# Altium PCB PT-MIS-PCB-003_v1 PCB.PcbDoc
Units mm, origin at the board's own origin, x right, y up, seen from the top; angles counter-clockwise.
Board outline 97 x 100 mm, 2 copper layers (Top Layer, Bottom Layer), stack 1.58 mm thick; 10 components, 5 nets, 37 pads, 42 vias.
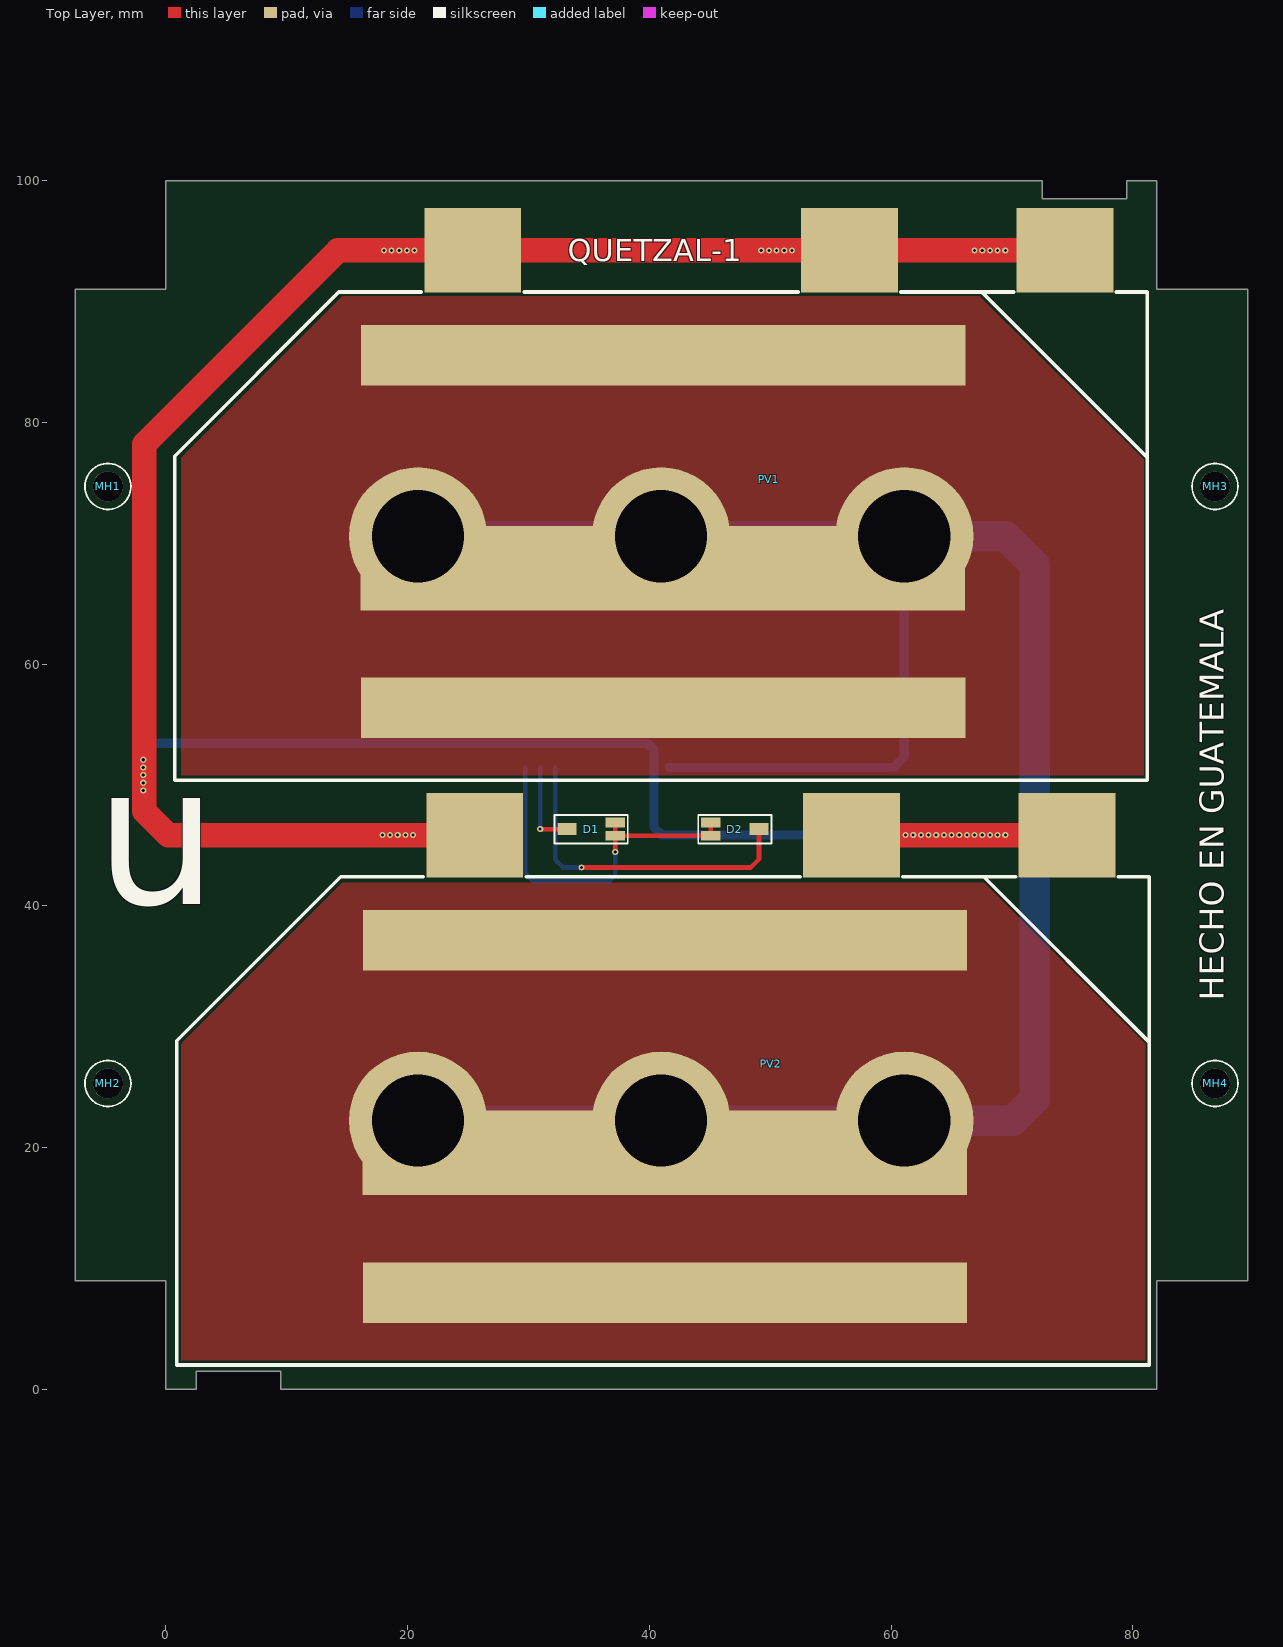
[diagram p0: Top Layer view]
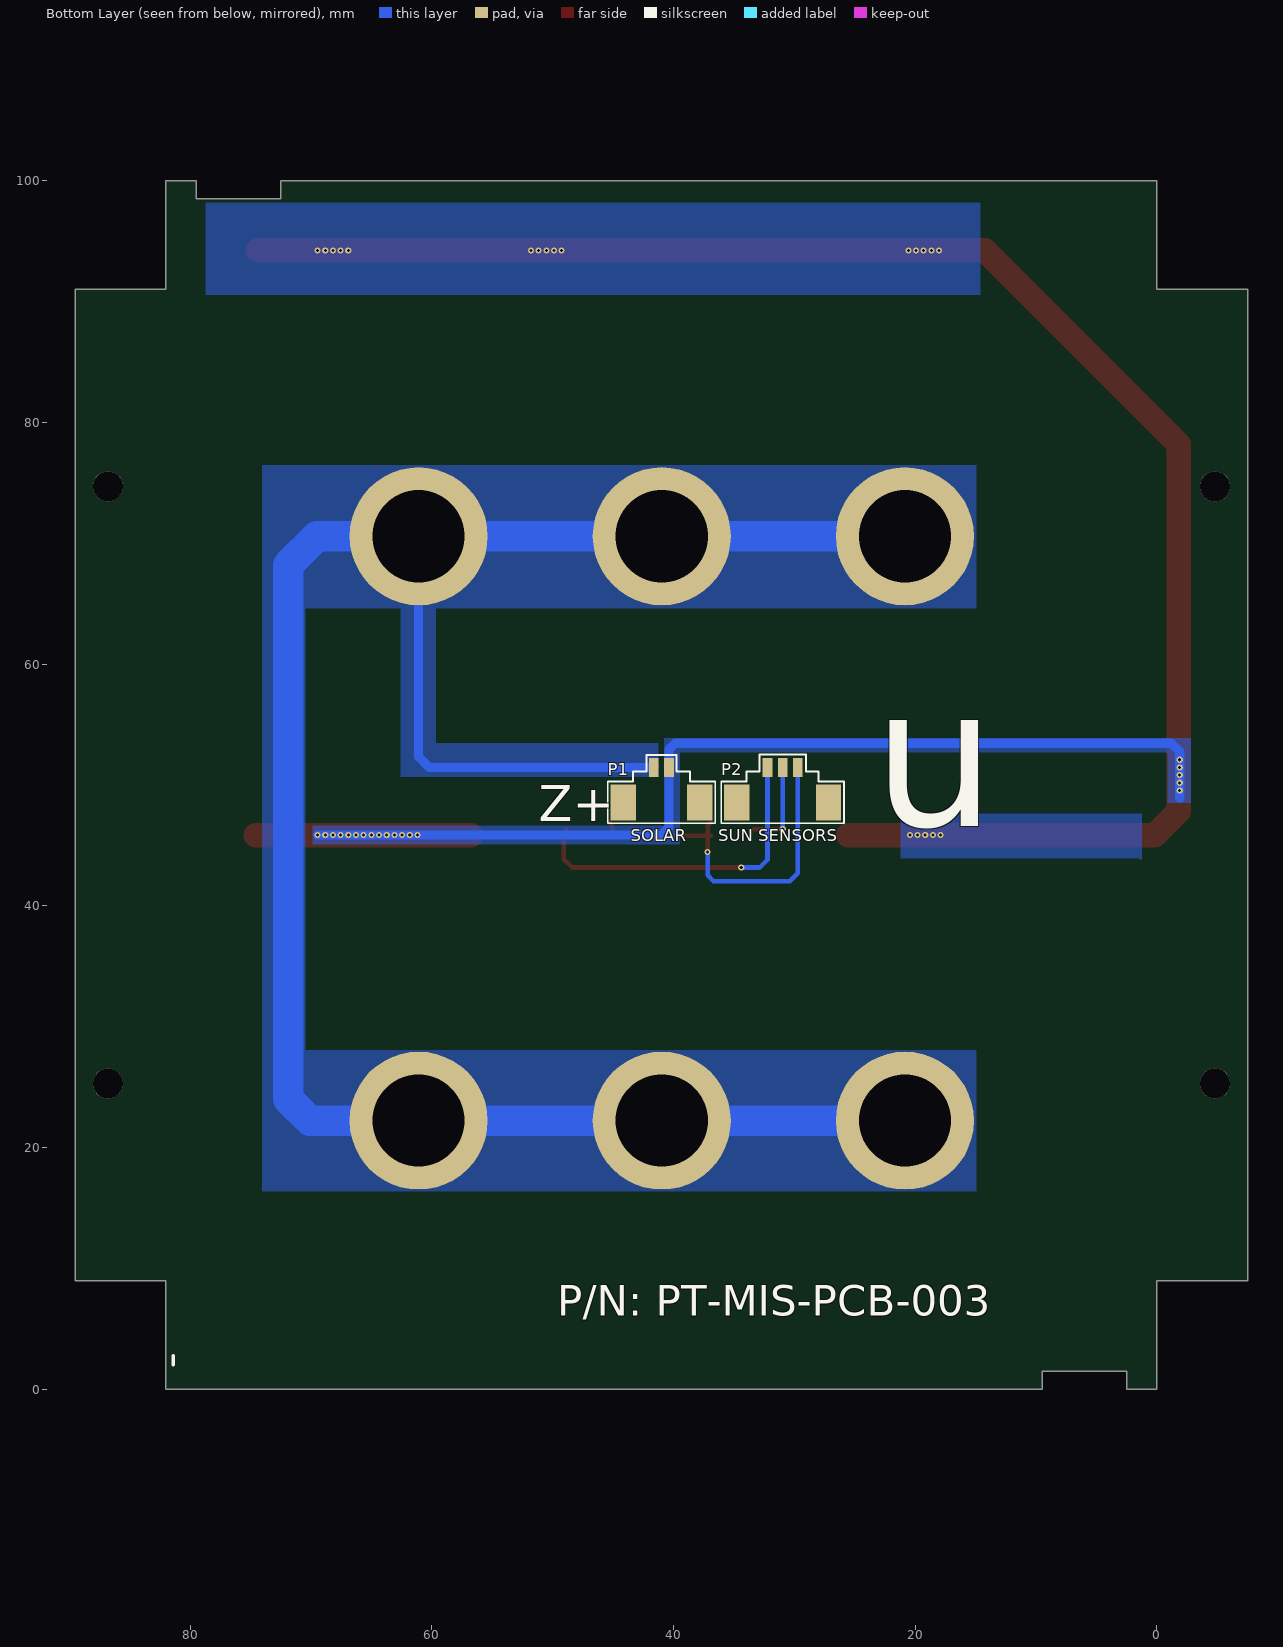
[diagram p1: Bottom Layer view, seen from below]
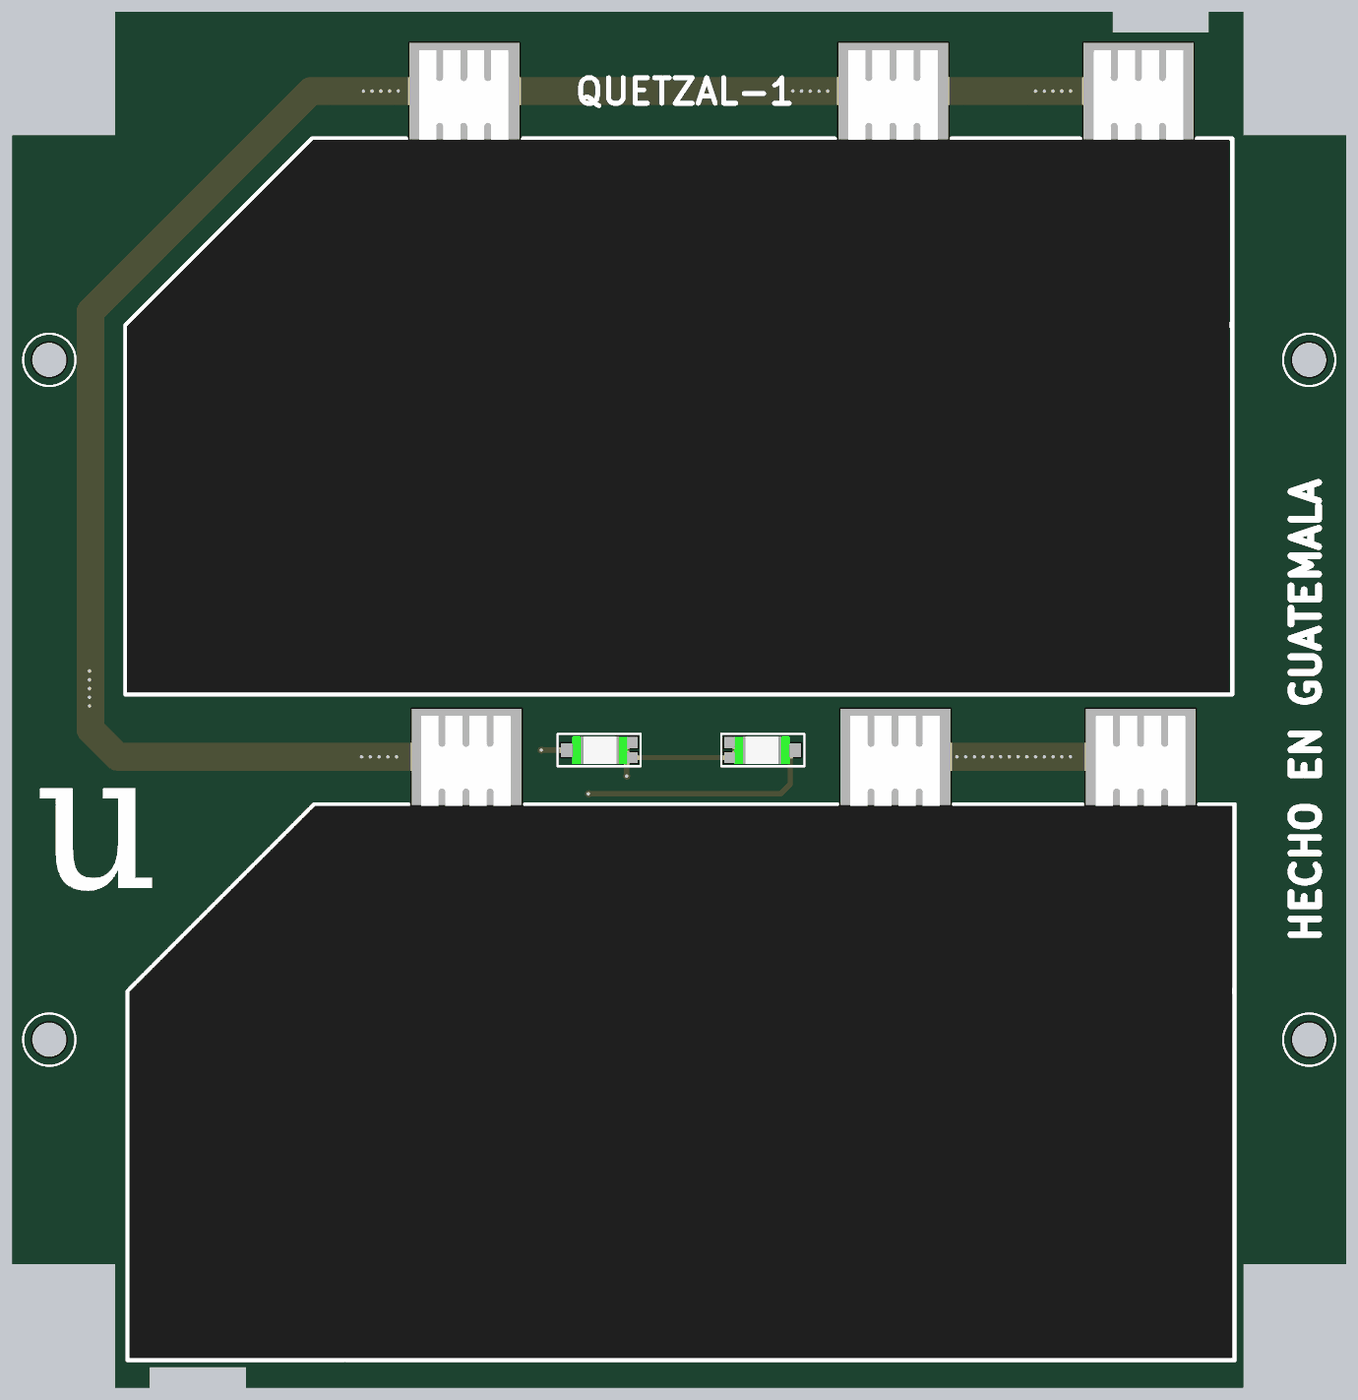
[diagram p2: 3D render of the assembled board from above, using the file's embedded part models]

## Layer stack, top to bottom
Top Solder: solder mask 0.0102, Solder Resist, Dk 3.5
Top Layer: signal copper 0.0356
Dielectric 1: dielectric 1.5086, FR-4, Dk 4.8
Bottom Layer: signal copper 0.0356
Bottom Solder: solder mask 0.0102, Solder Resist, Dk 3.5

## Board outline
0,9 0,0 2.5,0 2.5,1.5 9.5,1.5 9.5,0 82,0 82,9 89.5,9 89.5,91 82,91 82,100 79.5,100 79.5,98.5 72.5,98.5 72.5,100 0,100 0,91 -7.5,91 -7.5,9

## Design rules (kind name [scope] priority, off if disabled: settings)
Clearance [All] p1: gap=0.254 ignorepadtopadclearanceinfootprint=FALSE except(0: Arc-Hole Track-Hole SMDPad-Hole THPad-Hole Via-Hole Fill-Hole Poly-Hole Region-Hole Text-Hole)
PolygonConnect [All] p1: connectstyle=Direct reliefconductorwidth=0.254 reliefentries=4 polygonreliefangle="90 Angle" airgapwidth=0.254
RoutingVias [All] p1: holewidth=0.711 width=1.27 viastyle="Through Hole" minholewidth=0.711 minwidth=1.27 maxholewidth=0.711 maxwidth=1.27
SolderMaskExpansion [All] p1: expansion=0.102
Width [All] p1: maxlimit=2.54 minlimit=0.254 preferedwidth=0.254
30 further rules are at their usual default settings.

## Classes and differential pairs
component class "[03] - SCHEMATIC": D1 D2 MH1 MH2 MH3 MH4 P1 P2

## Components (designator, comment, footprint, x,y, rotation, side; value= is the part's Value field where it differs from the comment)
D1 "TEMD6010FX01" TEMD6010FX01 35.155,46.342 r180 top
D2 "TEMD6010FX01" TEMD6010FX01 47.096,46.342 r0 top
MH1 "MH_3.8MMNC_2MMD" MH_3.8MMNC_2MMD_NON_COPPER_NPTH -4.8,74.7 r0 top
MH2 "MH_3.8MMNC_2MMD" MH_3.8MMNC_2MMD_NON_COPPER_NPTH -4.8,25.3 r0 top
MH3 "MH_3.8MMNC_2MMD" MH_3.8MMNC_2MMD_NON_COPPER_NPTH 86.8,74.7 r0 top
MH4 "MH_3.8MMNC_2MMD" MH_3.8MMNC_2MMD_NON_COPPER_NPTH 86.8,25.3 r0 top
P1 "0533980271" 0533980271 41,50 r180 bottom
P2 "0533980371" 0533980371 30.977,50 r180 bottom
PV1 "AZUR SPACE 3G30A" "AZUR SPACE 3G30A" 41.11,67.937 r0 top
PV2 "AZUR SPACE 3G30A" "AZUR SPACE 3G30A" 41.275,19.558 r0 top

## Footprints (in the part's own frame and the unit in brackets; to place one, negate y for a bottom-side part, rotate by r counter-clockwise, add the part's x,y. Pads: shape width x height; smd on the part's side, far side on the other; paste and mask are expansions set on the pad)
0533980271 [mm] "CONN HEADER 2POS 1.25MM VERT SMD"
  rect 2.1x3 smd: 0(-3.175,-1.45) 0(3.175,-1.45)
  rect 0.8x1.6 smd: 1(-0.625,1.45) 2(0.625,1.45)
  silkscreen extent -4.45,-3.17 4.45,2.48, body extent -3.82,-2.72 3.83,1.48, height 4.71
0533980371 [mm] "CONN HEADER 3POS 1.25MM VERT SMD"
  rect 2.1x3 smd: 0(-3.8,-1.45) 0(3.8,-1.45)
  rect 0.8x1.6 smd: 1(-1.25,1.45) 2(0,1.45) 3(1.25,1.45)
  silkscreen extent -5.07,-3.18 5.07,2.53, body extent -4.45,-2.67 4.45,1.53, height 4.68
"AZUR SPACE 3G30A" [mm] "30% Triple Junction GaAs Solar Cell Assembly"
  rect 50x7 smd: 1(0,0)
  rect 50x5 smd: 1(0.026,-11.557) 1(0.026,17.602)
  rect 8x7 smd: 2(-15.727,26.297) 2(15.448,26.297) 3(33.273,26.297)
  silkscreen extent -40.38,-17.55 40.1,22.85, body extent -40.25,-17.41 39.9,29.27, height 0.31
MH_3.8MMNC_2MMD_NON_COPPER_NPTH [mm] "Mounting Hole 3.8mm Diameter (Non Copper), 2mm Drill NPTH"
  round 2.5 hole 2.5 unplated: 1(0,0)
  silkscreen extent -1.9,-1.9 1.9,1.9
TEMD6010FX01 [mm]
  rect 1.6x0.8 smd: 1(-2.025,-0.55) 1(-2.025,0.55)
  rect 1.6x1 smd: 2(1.975,0)
  silkscreen extent -3.05,-1.17 3,1.18, body extent -2.07,-1 1.93,1, height 1.01

## Part data
D1 D2: "Ambient Light Sensor", Current - Dark (Typ)=2nA, Manufacturer="Vishay Semiconductors", Operating Temperature="-40°C ~ 100°C", Standard Package=3,000, Supplier Part Number 1=751-1051-1-ND, Voltage - DC Reverse (Vr) (Max)=16V, Active Area=0.27mm², Catalog Drawings=TEMx60x0(F)X01, Category="Sensors, Transducers", ComponentLink1Description=https://datasheet.ciiva.com/8280/temd6010-8280593.pdf, ComponentLink1URL=https://datasheet.ciiva.com/8280/temd6010-8280593.pdf, ComponentLink2Description=https://datasheet.ciiva.com/1252/temd6010-1252130.pdf, ComponentLink2URL=https://datasheet.ciiva.com/1252/temd6010-1252130.pdf, ComponentLink3Description=https://datasheet.ciiva.com/2819/temd6010-2819730.pdf, ComponentLink3URL=https://datasheet.ciiva.com/2819/temd6010-2819730.pdf, ComponentLink4Description=https://datasheet.ciiva.com/2819/temd6010-2819731.pdf, ComponentLink4URL=https://datasheet.ciiva.com/2819/temd6010-2819731.pdf, ComponentLink5Description=https://datasheet.ciiva.com/2819/temd6010-2819732.pdf, ComponentLink5URL=https://datasheet.ciiva.com/2819/temd6010-2819732.pdf, ComponentLink6Description=https://datasheet.ciiva.com/4270/temd6010-4270070.pdf, ComponentLink6URL=https://datasheet.ciiva.com/4270/temd6010-4270070.pdf, ComponentLink7Description=https://datasheet.ciiva.com/46430/1794172-46430214.pdf, ComponentLink7URL=https://datasheet.ciiva.com/46430/1794172-46430214.pdf, ComponentLink8Description=https://datasheet.ciiva.com/1249/temd6010-1249179.pdf, ComponentLink8URL=https://datasheet.ciiva.com/1249/temd6010-1249179.pdf, ComponentLink9Description=https://datasheet.ciiva.com/4697/temd6010-102586-4697659.pdf, ComponentLink9URL=https://datasheet.ciiva.com/4697/temd6010-102586-4697659.pdf, Diode Type=PIN, Family="Optical Sensors - Photodiodes", Featured Product="Surface-Mount Ambient Light Sensing Photodiodes", Manufacturer Part Number=TEMD6010FX01, Mounting Type="Surface Mount", Online Catalog="Ambient Light Sensor", Other Names=751-1051-2, Packaging="Tape & Reel (TR)", Pricing 1="1=2.26, 10=1.998, 25=1.4824, 100=1.2892, 250=1.1603, 500=1.0314, 1000=0.8863 (USD)", Product Training Modules="Ambient Light Sensors", Spectral Range="430nm ~ 610nm", Stock 1=29, Supplier 1=Digi-Key, Viewing Angle=120°, Wavelength=540nm
MH1 MH2 MH3 MH4: "Mounting Hole 3.8mm Diameter (Non Copper), 2mm Drill NPTH"
P1: "2 Positions Header, Shrouded Connector 0.049\" (1.25mm) Surface Mount, Right Angle Tin", Color=Natural, Manufacturer=Molex, Supplier Part Number 1=WM7606CT-ND, Category="Connectors, Interconnects", ComponentLink1Description=https://datasheet.ciiva.com/6813/533980271-sd-6813860.pdf, ComponentLink1URL=https://datasheet.ciiva.com/6813/533980271-sd-6813860.pdf, ComponentLink2Description=https://datasheet.ciiva.com/3117/0533980271-pcb-headers-3117624.pdf, ComponentLink2URL=https://datasheet.ciiva.com/3117/0533980271-pcb-headers-3117624.pdf, ComponentLink3Description=https://datasheet.ciiva.com/3117/0533980271-pcb-headers-3117625.pdf, ComponentLink3URL=https://datasheet.ciiva.com/3117/0533980271-pcb-headers-3117625.pdf, ComponentLink4Description=https://datasheet.ciiva.com/6813/533980271-sd-6813869.pdf, ComponentLink4URL=https://datasheet.ciiva.com/6813/533980271-sd-6813869.pdf, Connector Type="Header, Shrouded", Contact Finish=Tin, Contact Finish Thickness="39µin (1.00µm)", Contact Mating Length=-, Contact Type="Blade Pin", Family="Rectangular Connectors - Headers, Male Pins", Fastening Type=-, Features="Solder Retention", Manufacturer Part Number=0533980271, Mounting Type="Surface Mount", Number of Positions=2, Number of Positions Loaded=All, Number of Rows=1, Packaging="Cut Tape (CT)", Pitch="0.049\" (1.25mm)", Pricing 1="1=0.88, 10=0.778, 100=0.6713, 500=0.5493 (USD)", Row Spacing=-, Series="PicoBlade™ 53398", Stock 1=25214, Supplier 1=Digi-Key, Termination=Solder
P2: "3 Positions Header, Shrouded Connector 0.049\" (1.25mm) Surface Mount Tin", Color=Natural, Manufacturer=Molex, Supplier Part Number 1=WM7607CT-ND, Category="Connectors, Interconnects", ComponentLink1Description=https://datasheet.ciiva.com/6813/533980271-sd-6813860.pdf, ComponentLink1URL=https://datasheet.ciiva.com/6813/533980271-sd-6813860.pdf, ComponentLink2Description=https://datasheet.ciiva.com/3117/0533980371-pcb-headers-3117626.pdf, ComponentLink2URL=https://datasheet.ciiva.com/3117/0533980371-pcb-headers-3117626.pdf, ComponentLink3Description=https://datasheet.ciiva.com/3117/0533980371-pcb-headers-3117627.pdf, ComponentLink3URL=https://datasheet.ciiva.com/3117/0533980371-pcb-headers-3117627.pdf, Connector Type="Header, Shrouded", Contact Finish=Tin, Contact Finish Thickness="39µin (1.00µm)", Contact Mating Length=-, Contact Type="Blade Pin", Family="Rectangular Connectors - Headers, Male Pins", Fastening Type=-, Features="Solder Retention", Manufacturer Part Number=0533980371, Mounting Type="Surface Mount", Number of Positions=3, Number of Positions Loaded=All, Number of Rows=1, Packaging=Digi-Reel®, Pitch="0.049\" (1.25mm)", Pricing 1="1=1.07, 10=0.942, 100=0.8126, 500=0.6649 (USD)", Row Spacing=-, Series="PicoBlade™ 53398", Stock 1=26974, Supplier 1=Digi-Key, Termination=Solder
PV1 PV2: "30% Triple Junction GaAs Solar Cell Assembly", Current at max. Power="502.9 mA", Voltage at max.Power="2409 mV", Average Efficiency (1353 W/m^2)=29.6, Average Efficiency (1367 W/m^2)=29.3, Average Open Circuit (BOL)="2690 mV", Average Short Circuit (BOL)="519.6 mA"

## Free pads (board coordinates)
  round 11.43 hole 7.62: 2(20.858,22.225) 2(20.858,70.574) 2(40.975,22.225) 2(40.975,70.574) 2(61.091,22.225) 2(61.091,70.574)

## Via types
v1: diameter 0.508, hole 0.254, Top Layer to Bottom Layer, tented both sides, 42 vias

## Nets (pads, with @x,y where several pads share a name; then routed paths per layer and width w, separated by ;. In a path a pad name is that pad's centre, name@x,y a point inside that pad or via, vN(x,y) a via of type N, cw(c..) or ccw(c..) an arc to the next point about the centre after c; other vN are vias at no path point)
2.35V: P1.1 pad.2 PV1.1 PV2.1 | length 186
  Bottom Layer w0.762: P1.1 60.205,51.45 61.091,52.337 pad.2@61.091,70.574
  Bottom Layer w2.54: pad.2@20.858,22.225 40.975,22.225 61.091,22.225 70.096,22.225 71.886,24.016 71.886,68.186 69.499,70.574 61.091,70.574 40.975,70.574 pad.2@20.858,70.574
GND: P1.2 PV1.2 PV1.3 PV2.2 PV2.3 | length 241.5
  Top Layer w2.032: PV2.2@25.548,45.855 v1(20.447,45.855) v1(19.177,45.855) v1(18.542,45.855) v1(17.907,45.855) 0.187,45.855 -1.799,47.841 -1.799,50.815 -1.799,52.085 -1.799,78.194 14.24,94.234 v1(18.034,94.234) v1(18.669,94.234) v1(19.939,94.234) v1(20.574,94.234) 25.383,94.234 v1(49.255,94.234) v1(49.89,94.234) v1(50.525,94.234) v1(51.16,94.234) v1(51.795,94.234) v1(66.908,94.234) v1(67.543,94.234) v1(68.178,94.234) v1(68.813,94.234) v1(69.448,94.234) PV1.3@74.383,94.234 ; PV2.2@56.723,45.855 v1(61.193,45.855) v1(61.828,45.855) v1(62.463,45.855) v1(63.098,45.855) v1(63.733,45.855) v1(64.368,45.855) v1(65.003,45.855) v1(65.638,45.855) v1(66.273,45.855) v1(66.908,45.855) v1(67.543,45.855) v1(68.178,45.855) v1(68.813,45.855) v1(69.448,45.855) PV2.3
  Bottom Layer w0.762: -1.877,48.91 v1(-1.877,49.545) v1(-1.877,50.18) v1(-1.877,50.815) v1(-1.877,51.45) v1(-1.877,52.085) -1.877,52.741 -1.164,53.454 39.857,53.454 40.375,52.936 P1.2 40.375,46.51 41.03,45.855 v1(61.193,45.855) v1(61.828,45.855) v1(62.463,45.855) v1(63.098,45.855) v1(63.733,45.855) v1(64.368,45.855) v1(65.003,45.855) v1(65.638,45.855) v1(66.273,45.855) v1(66.908,45.855) v1(67.543,45.855) v1(68.178,45.855) v1(68.813,45.855) v1(69.448,45.855)
  other v1: 19.812,45.847 19.304,94.234
NetD1_1: D1.1 D2.1 P2.3 | length 31.1
  Top Layer w0.254: D1.1@37.18,45.554 36.942,45.792 D1.1@37.18,46.03 ; D2.1@45.071,46.042 D2.1@45.321,45.792
  Top Layer w0.381: D1.1@36.93,45.792 36.942,45.792 D2.1@45.321,45.792 ; D1.1@36.93,46.892 37.18,46.642 D1.1@37.18,46.03 ; v1(37.18,44.45) D1.1@37.18,45.554 ; D2.1@45.071,46.042 45.071,46.642 D2.1@45.321,46.892
  Bottom Layer w0.381: P2.3 29.727,42.689 30.392,42.024 36.69,42.024 37.18,42.514 v1(37.18,44.45)
NetD1_2: D1.2 P2.2 | length 7.5
  Top Layer w0.381: v1(30.967,46.342) D1.2 D1.2@33.38,46.342
  Bottom Layer w0.254: v1(30.967,46.342) v1@30.977,46.352
  Bottom Layer w0.381: v1@30.977,46.352 P2.2
NetD2_2: D2.2 P2.1 | length 27.6
  Top Layer w0.381: v1(34.396,43.167) 48.374,43.167 49.071,43.864 49.071,46.142 D2.2@48.871,46.342
  Bottom Layer w0.381: P2.1 32.227,43.812 32.872,43.167 v1(34.396,43.167)
pads on no net: MH1.1 MH2.1 MH3.1 MH4.1 P1.0 P2.0

## Polygon pours and split planes (outlines as drawn)
2.35V on Top Layer "Bottom Layer-No Net 1" (solid, remove dead copper, pour order 16): 14.605,41.91 1.27,28.575 1.27,2.413 81.026,2.413 81.026,28.575 67.691,41.91
2.35V on Top Layer "Bottom Layer-No Net 1" (solid, remove dead copper, pour order 14): 67.31,90.424 14.605,90.424 1.27,77.089 1.27,50.8 80.899,50.8 80.899,76.962
GND on Bottom Layer "Bottom Layer-No Net 1" (solid, remove dead copper, pour order 12): 21.209,47.625 1.27,47.625 1.27,43.688 1.524,43.942 21.209,43.942
GND on Bottom Layer "Bottom Layer-No Net 1" (solid, remove dead copper, pour order 10): 69.85,46.609 40.767,46.609 40.767,53.848 -2.794,53.848 -2.794,48.514 -0.889,48.514 -0.889,52.705 39.497,52.705 39.497,45.085 69.85,45.085
2.35V on Bottom Layer "Bottom Layer-No Net 1" (solid, remove dead copper, pour order 8): 14.965,76.441 74.02,76.441 74.02,16.37 14.965,16.37 14.965,28.054 70.464,28.054 70.464,64.63 14.965,64.63
2.35V on Bottom Layer "Bottom Layer-No Net 1" (solid, remove dead copper, pour order 6): 41.254,53.454 59.669,53.454 59.669,65.392 62.59,65.392 62.59,50.66 41.254,50.66
GND on Bottom Layer "Bottom Layer-No Net 1" (solid, remove dead copper, pour order 4): 78.719,98.158 14.605,98.158 14.605,90.538 38.46,90.538 40.111,90.538 78.719,90.538

## Silkscreen, mask and mechanical layers (free items; w line width, h text height)
Top Overlay:
  text "QUETZAL-1" at 33.253,93.332 h1.85
  text "u" at -5.863,36.309 h20
  text "HECHO EN GUATEMALA" at 87.503,32.131 h2 r90
Bottom Overlay:
  lines w0.3: 81.386,2.019 81.386,2.781
  text "Z+" at 51.16,46.977 h3
  text "SUN SENSORS" at 36.301,45.326 h1
  text "SOLAR" at 43.54,45.326 h1
  text "u" at 23.474,42.786 h20
  text "P/N: PT-MIS-PCB-003" at 49.636,6.083 h2.54
Mechanical Drawing:
  circle w0.254: c86.8,74.7 r1.211
  circle w0.254: c86.8,25.3 r1.211
  circle w0.254: c-4.8,25.3 r1.244
  circle w0.254: c-4.8,74.7 r1.253
  lines w0.3: -7.5,9 -7.5,91 ; -7.493,9 0,9 0,0 2.5,0 2.5,1.5 ; -7.493,91 0,91 0,100 72.517,100 72.517,98.5 79.502,98.5 79.502,100 82,100 82,91 ; 2.54,1.5 9.5,1.5 9.5,0 ; 9.627,0 82,0 82,9 ; 82.042,9 89.5,9 89.5,91 82.042,91
  text "Mechanical Drawing of PT-MIS-PCB-003_v1" at 12.065,106.045 h1.52
  text "Units: mm" at -26.035,-10.033 h1.52
  text "Scale: 1:1" at -26.035,-12.573 h1.52
Board Outline:
  lines w0.254: 0,9 0,9
  lines w0.3: -7.5,9 0,9 0,0 2.5,0 2.5,1.5 9.5,1.5 9.5,0 82,0 82,9 89.5,9 89.5,91 82,91 82,100 79.5,100 79.5,98.5 72.5,98.5 72.5,100 0,100 0,91 -7.5,91 -7.5,9
ASM Top:
  text "Assembly TOP of PT-MIS-PCB-003_v1" at 16.764,100.965 h1.52
ASM Bottom:
  text "Assembly BOTTOM of PT-MIS-PCB-003_v1" at 14.605,103.505 h1.52

## Dimensions
0,0 to 9.627,0 on Mechanical Drawing
0,0 to 2.5,0 on Mechanical Drawing
9.5,1.5 to 9.627,0 on Mechanical Drawing
0,0 to -7.493,9 on Mechanical Drawing
0,0 to 0,9 on Mechanical Drawing
-4.8,24.056 to 86.8,24.089 on Mechanical Drawing
-3.556,25.3 to 0,0 on Mechanical Drawing
-4.8,74.803 to -3.556,25.3 on Mechanical Drawing
-7.493,9 to 89.5,9 on Mechanical Drawing
0,0 to 0,100 on Mechanical Drawing